# Altium PCB Power for Slaves.PcbDoc
Units mm, origin at the board's own origin, x right, y up, seen from the top; angles counter-clockwise.
Board outline 43.05 x 50.29 mm, 2 copper layers (Top Layer, Bottom Layer); 11 components, 6 nets, 55 pads, 0 vias.
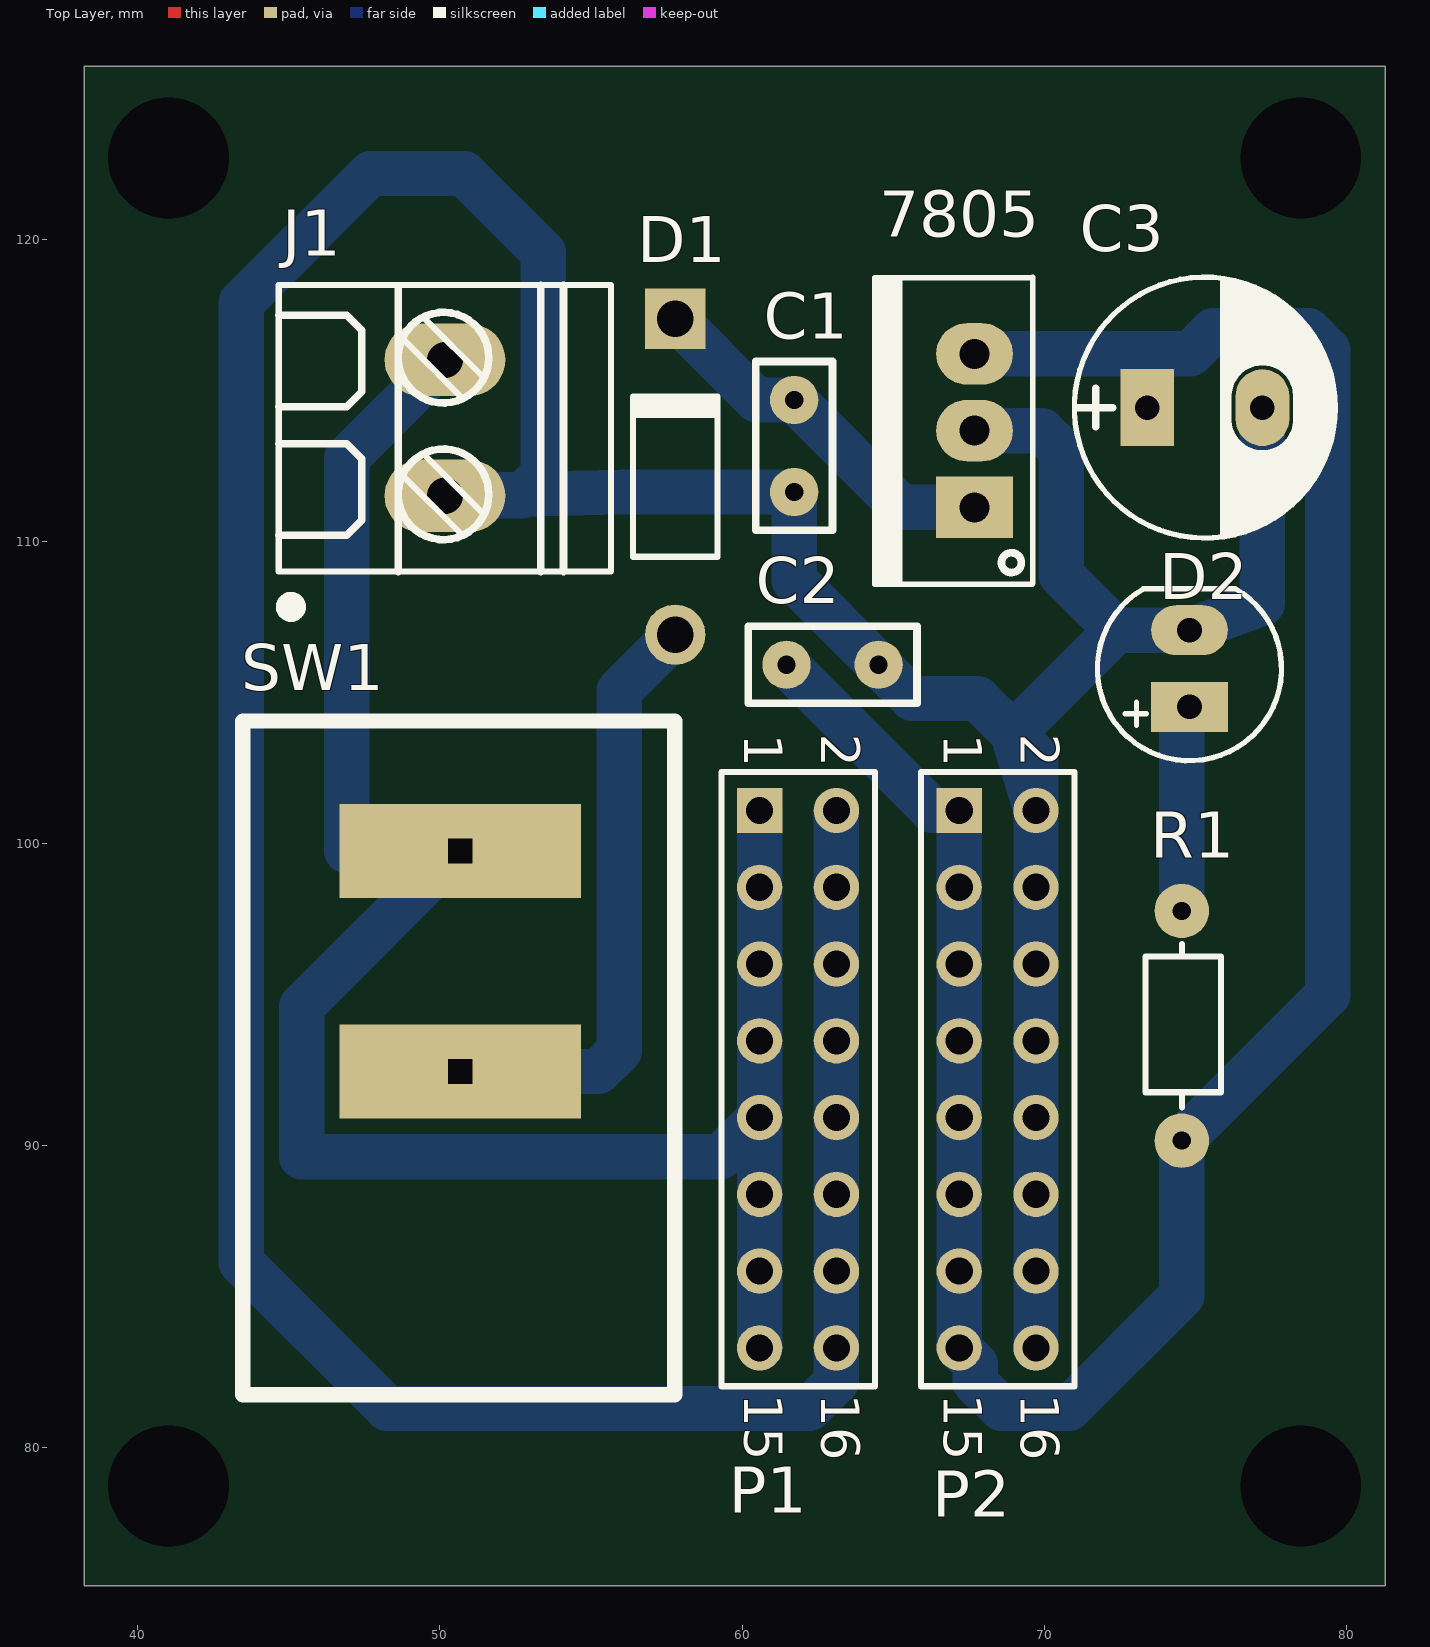
[diagram p0: Top Layer view]
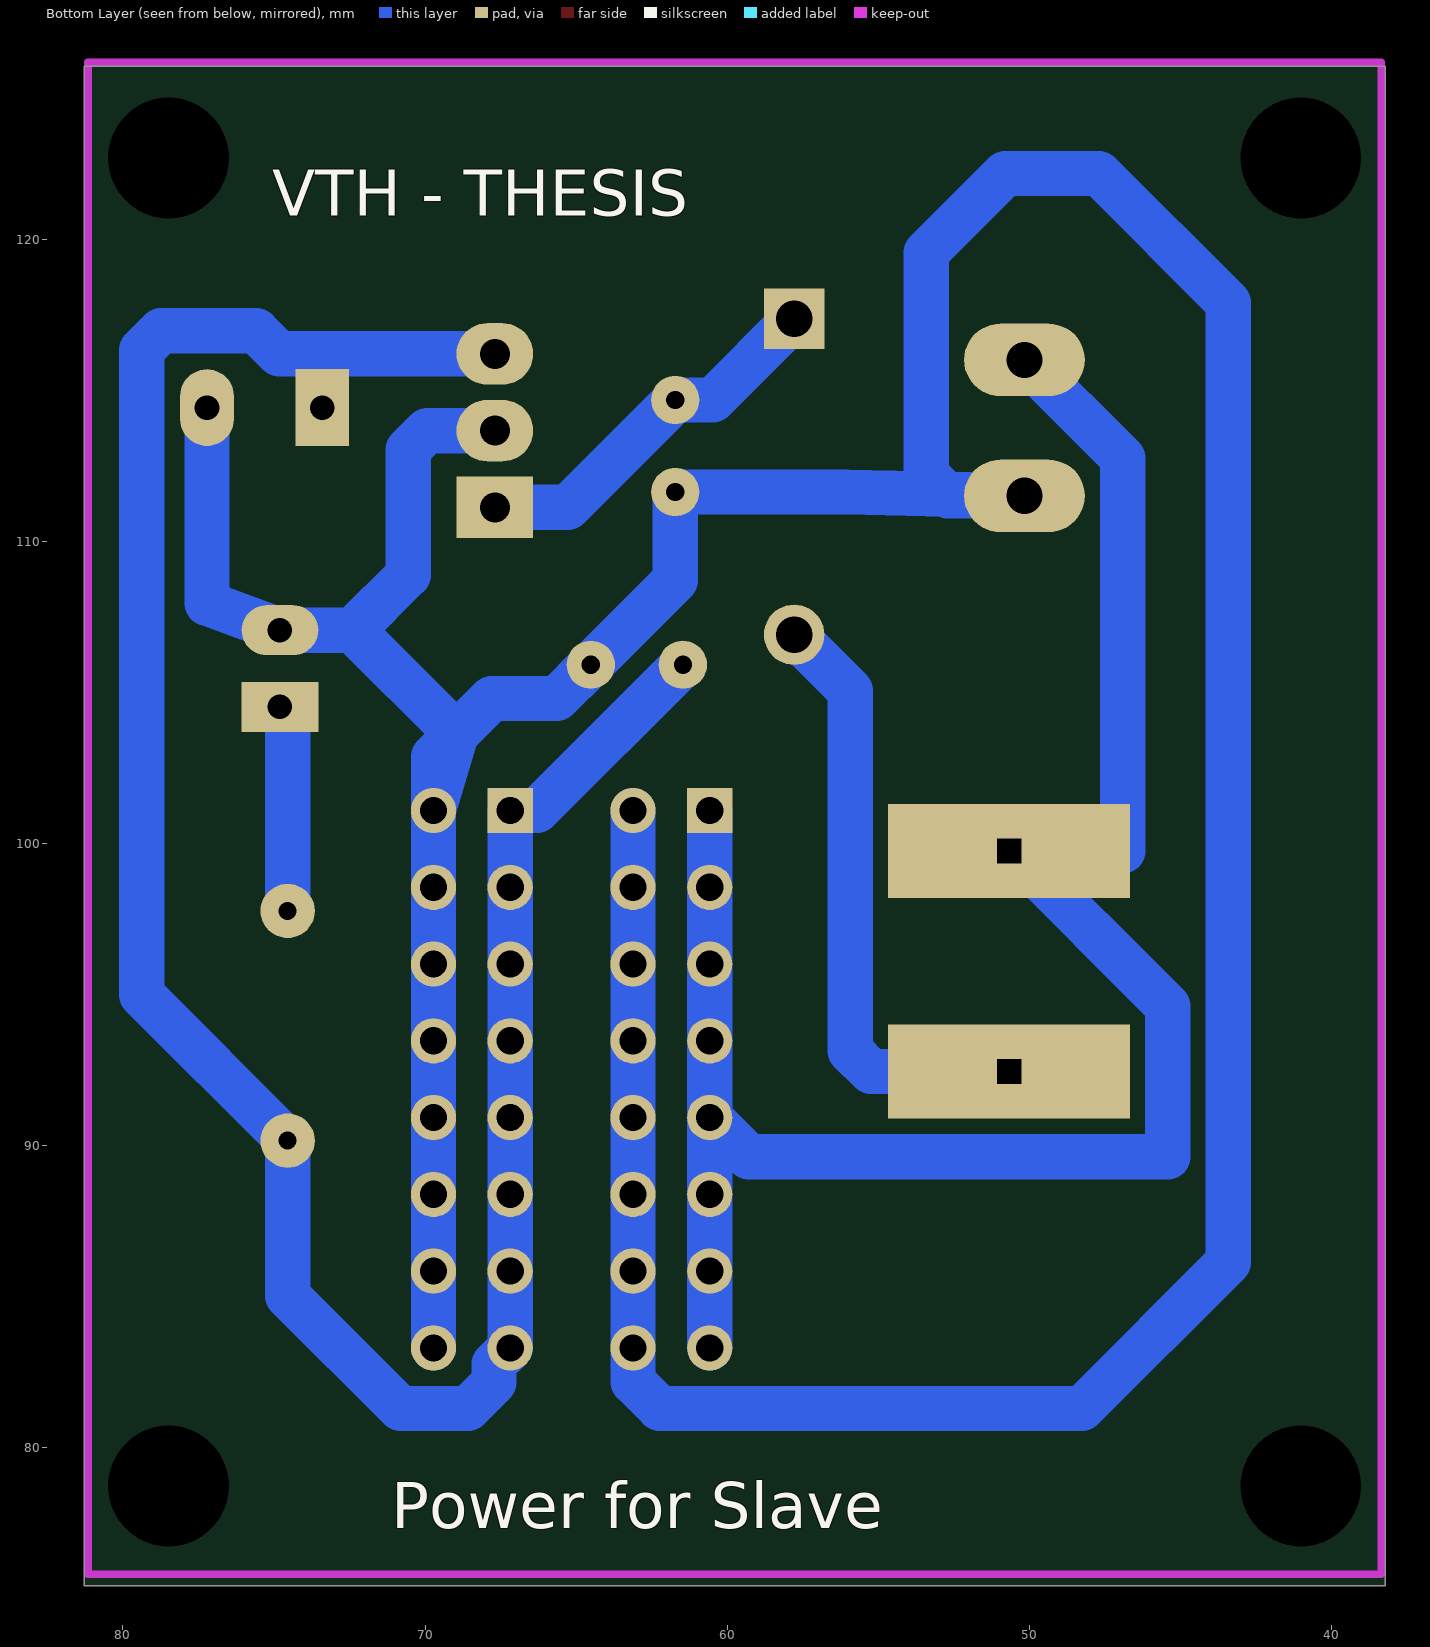
[diagram p1: Bottom Layer view, seen from below]
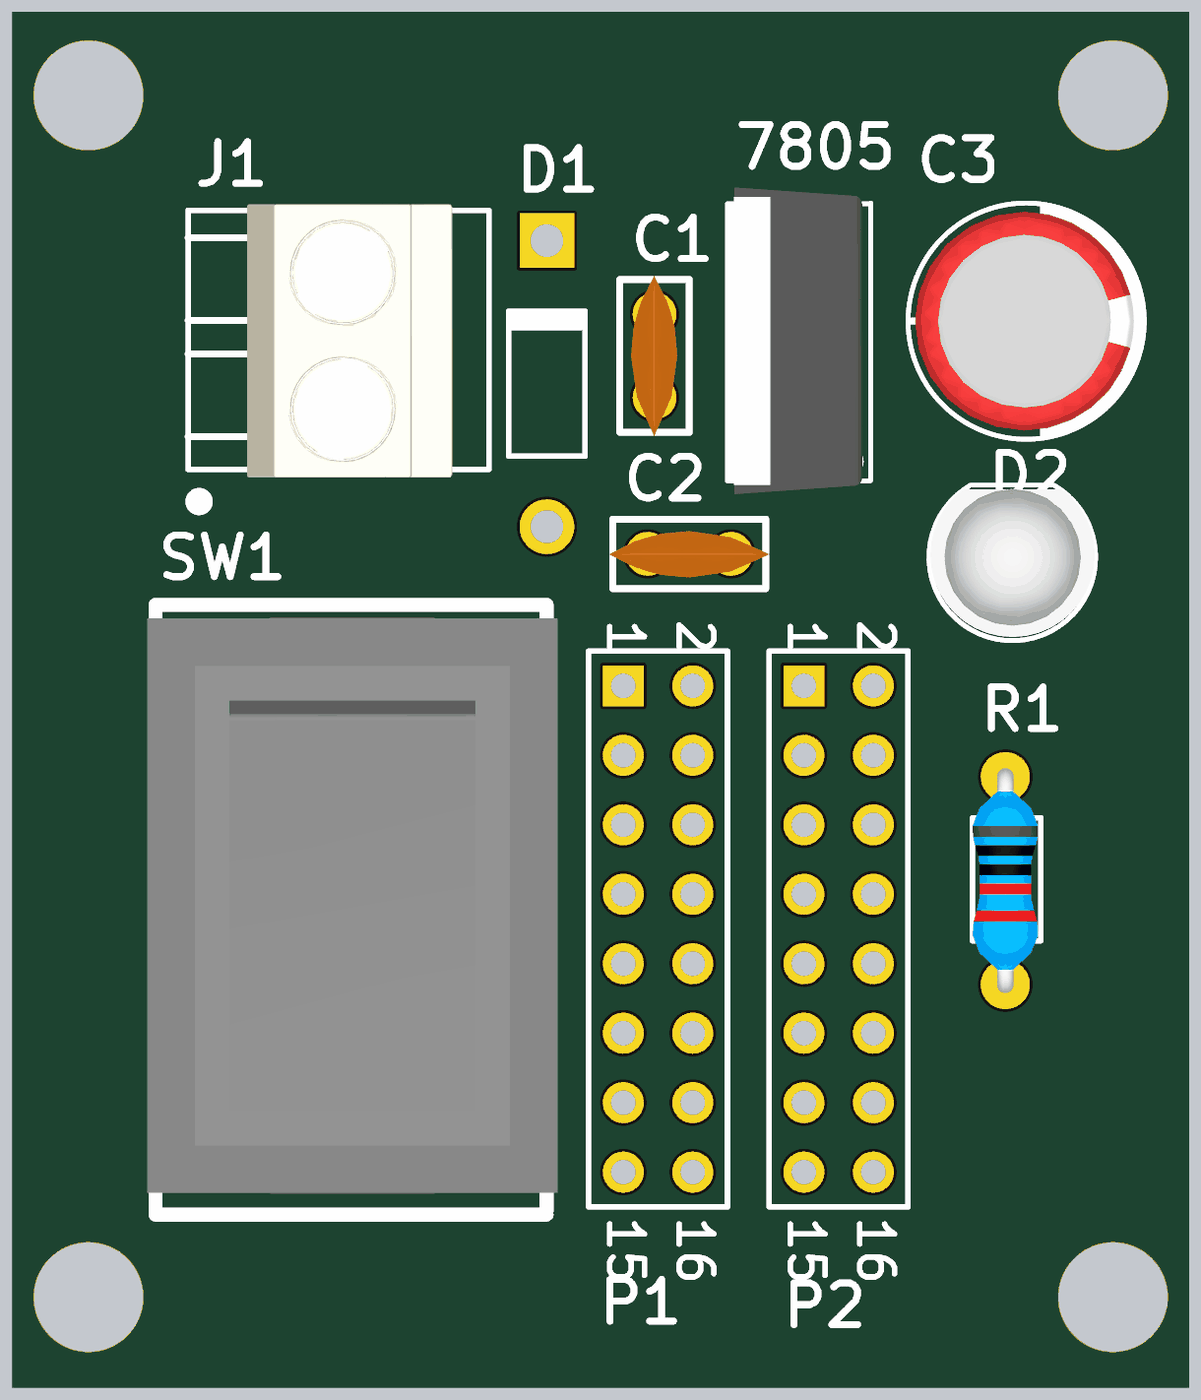
[diagram p2: 3D render of the assembled board from above, using the file's embedded part models]

## Layer stack, top to bottom
Top Solder: solder mask 0.0102, Solder Resist, Dk 3.5
Top Layer: signal copper 0.0356
Dielectric 1: dielectric 0.32, FR-4, Dk 4.8
Bottom Layer: signal copper 0.0356
Bottom Solder: solder mask 0.0102, Solder Resist, Dk 3.5

## Board outline
38.227,75.438 81.28,75.438 81.28,125.73 38.227,125.73

## Design rules (kind name [scope] priority, off if disabled: settings)
Clearance [All] p1: gap=0.5 ignorepadtopadclearanceinfootprint=FALSE
PolygonConnect [All] p1: connectstyle=Relief reliefconductorwidth=1 reliefentries=4 polygonreliefangle="90 Angle" airgapwidth=0.5
RoutingLayers [All] p1: top layer_v5=FALSE bottom layer_v5=TRUE
RoutingVias [All] p1: holewidth=0.711 width=1.27 viastyle="Through Hole" minholewidth=0.711 minwidth=1.27 maxholewidth=0.711 maxwidth=1.27
SolderMaskExpansion [All] p1: expansion=0.102
Width [All] p1: maxlimit=3 minlimit=1 preferedwidth=1.5
29 further rules are at their usual default settings.

## Components (designator, comment, footprint, x,y, rotation, side; value= is the part's Value field where it differs from the comment)
7805 "L78M05CP" QTO-220 67.691,111.125 r90 top
C1 "Cap Non-pol" "Cap Non-Pol 3mm" 61.722,113.157 r90 top value=100n
C2 "Cap Non-pol" "Cap Non-Pol 3mm" 62.992,105.918 r180 top value=100n
C3 "100uF/16V" CP1.5/3.4 73.406,114.427 r0 top value=100uF/35V/50V
D1 "Diode 1N4007" DO-41 57.785,112.141 r90 top
D2 "LED" "LED-5mm RED" 74.803,104.521 r90 top
J1 "CON.Domino2" "Domino 2M" 55.665,118.481 r180 top
P1 "Header 8X2" HDR2X8 60.579,101.092 r270 top
P2 "Header 8X2" HDR2X8 67.183,101.092 r270 top
R1 "RES_SMD_0805" "RESISTOR 1/4W" 74.549,97.77 r270 top value=1k
SW1 "SW_BapBenh" SW_Bapbenh 50.573,99.056 r180 top

## Footprints (in the part's own frame and the unit in brackets; to place one, negate y for a bottom-side part, rotate by r counter-clockwise, add the part's x,y. Pads: shape width x height; smd on the part's side, far side on the other; paste and mask are expansions set on the pad)
"Cap Non-Pol 3mm" [mm] "Capacitor, Radial; Body 5.6 x 2.5 mm (L x W typ); Pin Spacing 3 mm (typ); Solder Pad 35mil"
  round 1.6 hole 0.6: 1(-1.524,0) 2(1.524,0)
  silkscreen extent -2.79,-1.27 2.79,1.27, body extent -2.92,-0.83 2.92,0.86, height 6.22
CP1.5/3.4 [mil] "Tu hoa 220->470uF,16V, 470uF/16V,25V"
  rect 70x100 hole 32: 1(0,0)
  oval 70x100 hole 32: 2(150,0)
  silkscreen extent -95,-170 245,170, body extent -85,-157 230,157, height 446
DO-41 [mm] "Diode, Axial; Body 5.2 x 2.7 mm (LxDia. max), Lead Dia. 0.86 mm (max)"
  round 2 hole 1.2: 1(-5.23,0)
  rect 2x2 hole 1.2: 2(5.23,0)
  silkscreen extent -2.65,-1.4 2.75,1.4
"Domino 2M" [mm]
  oval 4x2.4 hole 1.2: 1(5.5,6.975) 2(5.5,2.475)
  silkscreen extent 0,0 11,10.9, body extent 1.35,-0.22 8.85,9.78, height 10
HDR2X8 [mm] "Connector; Header; 8x2 Position"
  rect 1.5x1.5 hole 0.9: 1(0,0)
  round 1.5 hole 0.9: 2(0,2.54) 3(2.54,0) 4(2.54,2.54) 5(5.08,0) 6(5.08,2.54) 7(7.62,0) 8(7.62,2.54) 9(10.16,0) 10(10.16,2.54) 11(12.7,0) 12(12.7,2.54) 13(15.24,0) 14(15.24,2.54) 15(17.78,0) 16(17.78,2.54)
  silkscreen extent -1.27,-1.27 19.05,3.81
"LED-5mm RED" [mil] "LED-5mm RED"
  rect 65x100 hole 32: 1(0,0)
  oval 65x100 hole 32: 2(100,0)
  silkscreen extent -70,-120 154,120, body extent -65,-119 149,118, height 339
QTO-220 [mil] "TO-220 - 1-2-3"
  rect 80x100 hole 39: 1(0,0)
  oval 80x100 hole 39: 2(100,0) 3(200,0)
  silkscreen extent -100,-76 300,130, body extent -119,-64 322,121, height 755
"RESISTOR 1/4W" [mm] "P=0.25W, PITCH = 7.6 mm"
  round 1.8 hole 0.6: 1(0,0) 2(7.6,0)
  silkscreen extent 1.1,-1.2 6.5,1.3, body extent -0.31,-1.2 7.91,1.2, height 2.7
SW_Bapbenh [mm] "Typical LED; GREEN; RED; 2 Leads; Solder Pad 35mil"
  rect 8x3.1 hole 0.8 square: 1(-0.1,-0.7) 2(-0.1,6.6)
  silkscreen extent -7.2,-5 7.1,17.3, body extent -7.6,-4.55 7.4,16.55, height 16.72

## Part data
7805: "Positive Voltage Regulator", ComponentLink1Description="Manufacturer Link", ComponentLink1URL=http://www.st.com/, ComponentLink2Description=Datasheet, ComponentLink2URL=http://www.st.com/stonline/products/literature/ds/2146/l78m05c.pdf, DatasheetVersion=Apr-1994, LatestRevisionDate=17-Jul-2002, LatestRevisionNote="Re-released for DXP Platform.", Note="Tab is connected to pin 3 (GND).", PackageDescription="TO, Thru-Hole, Vertical, Heatsink Mounted; 3 In-Line Leads; Pitch 2.54 mm; Pin sequence 1, 3, 2", PackageReference=ISOWATT220AB, PackageVersion=Jul-1998, Published=24-Aug-2001, Publisher="Altium Limited"
C1 C2: "Non-polarized Capacitor", LatestRevisionDate=17-Jul-2002, LatestRevisionNote="Re-released for DXP Platform.", PackageReference=RAD-0.3, Published=8-Jun-2000, Publisher="Altium Limited"
C3: library part CP3, "Cap 100uF/35V - 470uF/16V", Description 1="1000uF/6,3V - 470uF/16V - 330uF - 25V", Description 2="220uF/35V - 100uF/50V - 63V - 4,7uF/200V", Description 3="22uF => 33uF100V - 3,3uF => 4,7uF/250V", Description 4="2,2uF =>3,3uF/350 - 2,2uF/400V - 1uF/450V"
D1: "1 Amp General Purpose Rectifier", Code_JEDEC=DO-204-AL, ComponentLink1Description="Manufacturer Link", ComponentLink1URL=http://www.fairchildsemi.com/, ComponentLink2Description=Datasheet, ComponentLink2URL=http://www.fairchildsemi.com/ds/1N%2F1N4001.pdf, DatasheetVersion=1998, LatestRevisionDate=17-Jul-2002, LatestRevisionNote="Re-released for DXP Platform.", PackageDescription="Diode, Axial; Body 5.2 x 2.7 mm (LxDia. max), Lead Dia. 0.86 mm (max)", PackageReference=DO-41, PackageVersion=Aug-1999, Published=8-Jun-2000, Publisher="Altium Limited"
D2: "Typical LED", LatestRevisionDate=08-Jul-2005, LatestRevisionNote="Mech Layer 1 removed.", PackageReference=LED-1, Published=8-Jun-2000, Publisher="Altium Limited"
J1: "2 pins Domino Header", ComponentLink1Description="Digikey Part link", ComponentLink2Description="Open DataSheet", ComponentLink2URL=H:\LIBRARY\LIBRARY.Datasheet\, Price=2000VND, Publisher="Hoang Nguyen"
P1 P2: "Header, 8-Pin, Dual row", LatestRevisionDate=17-Jul-2002, LatestRevisionNote="Re-released for DXP Platform.", Publisher="Altium Limited"
R1: "RES_0805", LatestRevisionDate=17-Jul-2002, LatestRevisionNote="Re-released for DXP Platform.", PackageReference=AXIAL-0.4, Published=8-Jun-2000, Publisher="Altium Limited"

## Free pads (board coordinates)
  round 1.524 hole 4: 10(78.486,122.682) 11(41.021,122.682) 12(41.021,78.74) 13(78.486,78.74)

## Nets (pads, with @x,y where several pads share a name; then routed paths per layer and width w, separated by ;. In a path a pad name is that pad's centre, name@x,y a point inside that pad or via, vN(x,y) a via of type N, cw(c..) or ccw(c..) an arc to the next point about the centre after c; other vN are vias at no path point)
12V: J1.2 P1.1 P1.3 P1.5 P1.7 P1.9 P1.11 P1.13 P1.15 SW1.1 | length 67.1
  Bottom Layer w1.5: J1.2 46.914,112.755 46.914,99.756 SW1.1@50.564,99.756 ; SW1.1 SW1.1@50.564,99.756 ; P1.15 P1.13 P1.11 P1.9 ; P1.1 P1.3 P1.5 P1.7 P1.9 ; SW1.1@50.564,99.756 45.423,94.615 45.423,89.637 59.284,89.637 P1.9
GND: 7805.2 C1.1 C2.1 C3.2 D2.2 J1.1 P1.2 P1.4 P1.6 P1.8 P1.10 P1.12 P1.14 P1.16 P2.2 P2.4 P2.6 P2.8 P2.10 P2.12 P2.14 P2.16 | length 169.7
  Bottom Layer w1.5: P1.2 P1.4 P1.6 P1.8 P1.10 P1.12 P1.14 P1.16 63.119,82.194 62.23,81.305 48.26,81.305 43.423,86.142 43.423,117.896 47.701,122.174 50.8,122.174 53.416,119.558 53.416,112.217 52.761,111.562 ; 7805.2 69.926,113.665 70.561,113.03 70.561,108.89 72.39,107.061 ; P2.16 P2.14 P2.12 P2.10 P2.8 P2.6 P2.4 P2.2 ; C3.2 77.216,107.95 D2.2 72.39,107.061 ; 52.761,111.562 J1.1 52.705,111.506 52.761,111.562 ; 52.761,111.562 56.083,111.633 C1.1 61.722,108.712 C2.1 65.634,104.8 67.793,104.8 68.961,103.632 ; 68.961,103.632 P2.2 ; 68.961,103.632 72.39,107.061 ; 68.961,103.632 69.723,102.87 P2.2
Net7805_1: 7805.1 C1.2 D1.2 | length 12.5
  Bottom Layer w1.5: D1.2 60.475,114.681 C1.2 65.278,111.125 7805.1
NetD1_1: D1.1 SW1.2 | length 20.1
  Bottom Layer w1.5: SW1.2 55.245,92.456 55.931,93.142 55.931,105.057 D1.1
NetD2_1: D2.1 R1.1 | length 7
  Bottom Layer w1.5: R1.1 74.549,104.521 D2.1
VCC: 7805.3 C2.2 C3.1 P2.1 P2.3 P2.5 P2.7 P2.9 P2.11 P2.13 P2.15 R1.2 | length 82.9
  Bottom Layer w1.5: C2.2 66.294,101.092 P2.1 P2.3 P2.5 P2.7 P2.9 P2.11 P2.13 P2.15 67.716,82.779 67.716,82.169 68.58,81.305 70.815,81.305 74.549,85.039 R1.2 79.375,94.996 79.375,116.332 78.74,116.967 75.59,116.967 74.828,116.205 73.406,116.205 ; 7805.3 73.406,116.205 ; C3.1 73.406,116.205

## Keep-outs
Bottom Layer:
  lines w0.254: 38.354,75.819 38.354,125.857 81.153,125.857 81.153,76.073 81.153,75.819 38.354,75.819

## Silkscreen, mask and mechanical layers (free items; w line width, h text height)
Bottom Overlay:
  text "VTH - THESIS" at 75.057,120.777 h1.52
  text "Power for Slave" at 71.12,77.343 h1.52

## Text inside footprints (layer, text, board x,y; h text height)
P1: Top Overlay "16" at 62.611,81.788 h1.27 r270; Top Overlay "15" at 60.071,81.788 h1.27 r270; Top Overlay "1" at 60.071,103.632 h1.27 r270; Top Overlay "2" at 62.611,103.632 h1.27 r270
P2: Top Overlay "16" at 69.215,81.788 h1.27 r270; Top Overlay "15" at 66.675,81.788 h1.27 r270; Top Overlay "1" at 66.675,103.632 h1.27 r270; Top Overlay "2" at 69.215,103.632 h1.27 r270